# Altium PCB ADIO_Ver1.2.PcbDoc (part 2 of 2)
Units mm, origin at the board's own origin, x right, y up, seen from the top; angles counter-clockwise.
Board outline 260 x 90 mm, 2 copper layers (Top Layer, Bottom Layer); 178 components, 134 nets, 625 pads, 141 vias.
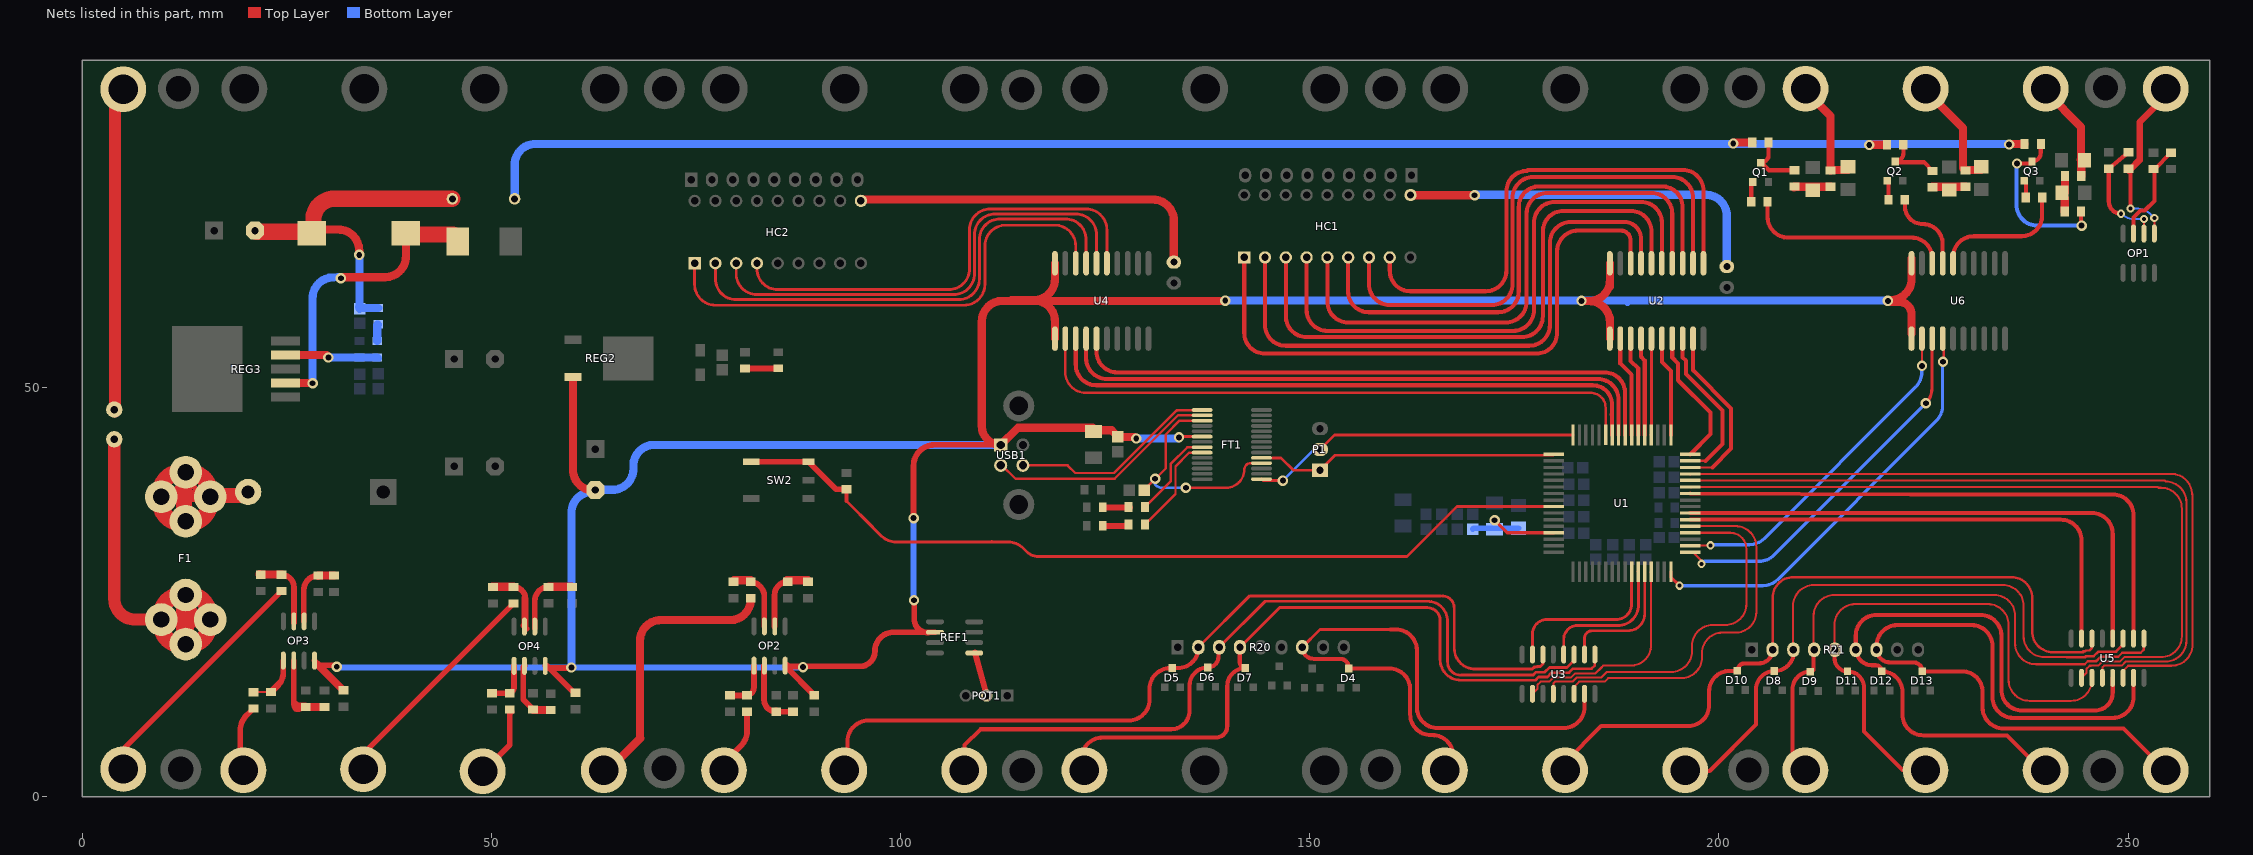
[diagram p2: the nets of this part, all layers, seen from the top]

## Via types
v1: diameter 1.27, hole 0.711, Top Layer to Bottom Layer, 127 vias
v2: diameter 1, hole 0.5, Top Layer to Bottom Layer, 13 vias
v3: diameter 1.5, hole 1, Top Layer to Bottom Layer, 1 vias

## Nets (pads, with @x,y where several pads share a name; then routed paths per layer and width w, separated by ;. In a path a pad name is that pad's centre, name@x,y a point inside that pad or via, vN(x,y) a via of type N, cw(c..) or ccw(c..) an arc to the next point about the centre after c; other vN are vias at no path point) (continued)
INPUT_DIG3: D4.3 R20.7 TP13.1 U3.7 | length 75.6
  Top Layer w0.35: R20.7@149.098,18.248 151.271,20.422 159.893,20.422
  Top Layer w0.5: R20.7@149.098,18.248 ccw(c150.506,18.248) 150.506,16.84 153.721,16.84 cw(c153.721,15.799) D4.3@154.762,15.799 ; D4.3@154.762,15.653 159.741,15.653 cw(c159.741,13.113) 162.281,13.113 162.281,10.058 ccw(c164.821,10.058) 164.821,7.518 164.998,7.518 cw(c164.998,4.978) TP13.1@167.538,4.978 ; 159.893,20.422 160.553,20.422 cw(c160.553,17.882) 163.093,17.882 163.093,10.922 ccw(c165.633,10.922) 165.633,8.382 181.039,8.382 ccw(c181.039,10.922) 183.579,10.922 U3.7@183.579,12.563
INPUT_DIG4: D5.3 R20.2 TP16.1 U3.14 | length 106.9
  Top Layer w0.33: 174.93,15.596 177.199,15.596
  Top Layer w0.35: R20.2@136.398,18.248 136.423,18.274 142.686,24.536 165.989,24.536 ; 166.178,24.529 cw(c166.178,23.042) 166.737,24.42 cw(c166.178,23.042) 167.665,23.042 167.665,18.136 ccw(c170.205,18.136) 170.205,15.596 174.93,15.596
  Top Layer w0.381: 177.199,15.596 177.423,15.819 177.676,15.819 177.762,15.905 178.195,15.905 178.499,16.208 U3.14@178.499,17.363
  Top Layer w0.5: TP16.1@93.218,3.226 93.523,3.531 93.523,6.756 cw(c96.063,6.756) 96.063,9.296 127.889,9.296 ccw(c127.889,11.836) 130.429,11.836 130.429,13.164 cw(c132.969,13.164) 132.969,15.704 D5.3@133.223,15.704 133.883,15.704 ccw(c133.883,18.244) 136.423,18.244 136.423,18.274 R20.2@136.423,18.313
INPUT_DIG5: D6.3 R20.3 TP15.1 U3.11 | length 97
  Top Layer w0.33: 174.35,14.855 177.321,14.855 177.675,15.209 178.725,15.209 179.293,15.778 181.446,15.778 U3.11@182.309,16.641
  Top Layer w0.35: R20.3@138.938,18.248 144.566,23.876 164.389,23.876 cw(c164.389,21.412) 166.853,21.412 166.853,16.461 ccw(c168.478,16.461) 168.478,14.836 cw(c168.497,14.836) 168.497,14.855 174.35,14.855
  Top Layer w0.381: U3.11@182.309,16.641 U3.11@182.309,17.363
  Top Layer w0.5: TP15.1@107.823,3.15 107.823,6.299 109.753,8.23 133.045,8.23 ccw(c133.045,10.516) 135.331,10.516 135.331,13.57 cw(c137.541,13.57) D6.3@137.541,15.78 ccw(c137.541,17.075) 138.836,17.075 R20.3@138.836,18.263
INPUT_DIG6: D7.3 R20.4 TP14.1 U3.9 | length 86
  Top Layer w0.33: 174.752,14.22 177.584,14.22 177.981,14.618 179.031,14.618 ; 179.014,14.635 179.048,14.635 179.556,15.143 181.709,15.143 182.198,15.632 184.455,15.632 184.849,16.026 U3.9@184.849,17.363
  Top Layer w0.35: R20.4@141.478,18.248 146.318,23.089 164.389,23.089 cw(c164.389,21.539) 164.695,23.058 cw(c164.389,21.539) 165.908,21.845 cw(c164.389,21.539) 165.938,21.539 165.938,16.76 ccw(c168.478,16.76) 168.478,14.22 174.752,14.22
  Top Layer w0.5: TP14.1@122.149,4.674 cw(c124.689,4.674) 124.689,7.214 138.532,7.214 ccw(c138.532,8.611) 139.929,8.611 139.929,13.494 cw(c142.138,13.494) D7.3@142.138,15.704 cw(c142.138,16.39) 141.453,16.39 R20.4@141.453,18.313
INPUT_DIG7: D8.3 R21.3 TP26.1 U5.11 | length 77.8
  Top Layer w0.254: R21.3@209.067,17.932 209.067,23.317 cw(c211.607,23.317) 211.607,25.857 234.696,25.857 cw(c234.696,23.317) 237.236,23.317 237.236,19.583 ccw(c239.776,19.583) 239.776,17.043 242.502,17.043
  Top Layer w0.3: 242.502,17.043 244.75,17.043 244.834,17.128 244.979,17.128 245.014,17.162 245.811,17.162 246.379,17.731 248.532,17.731 249.395,18.594 U5.11@249.395,19.316
  Top Layer w0.5: TP26.1@196.088,3.15 198.882,3.15 204.546,8.814 204.546,13.113 cw(c206.781,13.113) D8.3@206.781,15.348 ccw(c206.781,17.736) 209.169,17.736 R21.3@209.169,18.059
INPUT_DIG8: D9.3 R21.4 TP24.1 U5.9 | length 71.3
  Top Layer w0.254: R21.4@211.582,17.958 211.582,22.098 cw(c214.122,22.098) 214.122,24.638 233.655,24.638 cw(c233.655,22.098) 236.195,22.098 236.195,18.713 ccw(c238.735,18.713) 238.735,16.173 240.97,16.173
  Top Layer w0.3: 240.97,16.173 244.706,16.173 245.076,16.544 245.221,16.544 245.249,16.571 246.117,16.571 ; 246.1,16.588 246.134,16.588 246.642,17.096 248.795,17.096 249.284,17.585 251.541,17.585 251.935,17.979 U5.9@251.935,19.316
  Top Layer w0.5: TP24.1@210.744,3.2 208.991,4.953 208.991,13.088 cw(c211.176,13.088) D9.3@211.176,15.272 ccw(c211.176,15.678) 211.582,15.678 R21.4@211.582,17.958
INPUT_DIG9: D10.3 R21.2 TP27.1 U5.14 | length 89.5
  Top Layer w0.3: R21.2@206.56,17.951 206.56,24.282 cw(c209.1,24.282) 209.1,26.822 235.737,26.822 cw(c235.737,24.282) 238.277,24.282 238.277,20.186 ccw(c240.817,20.186) 240.817,17.646 240.944,17.646 ; 240.944,17.628 244.508,17.628 244.581,17.7 244.509,17.772 244.762,17.772 244.848,17.858 245.282,17.858 245.585,18.161 U5.14@245.585,19.316
  Top Layer w0.5: TP27.1@181.178,3.15 181.178,4.191 185.623,8.636 196.266,8.636 ccw(c196.266,11.176) 198.806,11.176 198.806,12.834 cw(c201.346,12.834) 201.346,15.374 D10.3@202.26,15.374 ; D10.3@202.311,15.443 cw(c203.149,15.443) 203.149,16.281 204.891,16.281 ccw(c204.891,17.951) R21.2@206.56,17.951
INPUT_DIG10: D11.3 R21.5 TP18.1 U5.3 | length 69
  Top Layer w0.254: R21.5@214.122,17.856 214.122,20.98 cw(c216.662,20.98) 216.662,23.52 232.867,23.52 cw(c232.867,20.98) 235.407,20.98 235.407,14.249 ccw(c237.947,14.249) 237.947,11.709 243.045,11.709 ccw(c243.045,14.249) 245.585,14.249 U5.3@245.585,14.516
  Top Layer w0.5: R21.5@214.147,18.009 214.147,16.882 ccw(c215.718,16.882) D11.3@215.718,15.311 cw(c215.718,13.3) 217.729,13.3 217.729,7.95 222.428,3.251 TP18.1@225.247,3.251
INPUT_DIG11: D12.3 R21.6 TP19.1 U5.5 | length 79.3
  Top Layer w0.5: R21.6@216.72,17.951 216.72,19.66 cw(c219.26,19.66) 219.26,22.2 231.978,22.2 cw(c231.978,19.66) 234.518,19.66 234.518,13.056 ccw(c237.058,13.056) 237.058,10.516 245.925,10.516 ccw(c245.925,12.716) 248.125,12.716 U5.5@248.125,14.516 ; R21.6@216.738,17.983 216.789,17.983 ccw(c218.719,17.983) 218.719,16.053 219.167,16.053 cw(c219.167,15.311) D12.3@219.909,15.311 ; D12.3@219.671,15.311 D12.3@219.909,15.311 ; TP19.1@239.674,3.023 235.204,7.493 224.968,7.493 cw(c224.968,10.033) 222.428,10.033 222.428,12.792 ccw(c219.909,12.792) D12.3@219.909,15.311
INPUT_DIG12: D13.3 R21.7 TP23.1 U5.7 | length 90
  Top Layer w0.5: R21.7@219.26,17.951 219.26,18.415 cw(c221.8,18.415) 221.8,20.955 230.886,20.955 cw(c230.886,18.415) 233.426,18.415 233.426,12.167 ccw(c235.966,12.167) 235.966,9.627 248.125,9.627 ccw(c248.125,12.167) 250.665,12.167 U5.7@250.665,14.516 ; R21.7@219.278,18.059 ccw(c220.929,18.059) 220.929,16.408 223.765,16.408 cw(c223.765,15.311) D13.3@224.862,15.311 229.692,15.311 cw(c229.692,12.771) 232.232,12.771 232.232,10.871 ccw(c234.772,10.871) 234.772,8.331 249.428,8.331 TP23.1@254.559,3.2
NetC8_2: C8.2 R1.1 R47.2 | length 4.5
  Top Layer w1: R1.1@209.169,74.447 209.235,74.513 R47.2@213.629,74.513
NetC11_1: C11.1 C12.2 FB2.1 L3.2 R3.2 | length 46.5
  Top Layer w1: L3.2@27.915,69.291 28.27,69.291 31.318,69.291 cw(c31.318,66.751) 33.858,66.751 v1(33.858,66.192)
  Top Layer w2: C11.1@21.26,69.012 27.88,69.012 cw(c27.88,68.834) L3.2@28.057,68.834 ; L3.2@28.27,68.656 28.27,69.291 28.27,70.51 cw(c30.81,70.51) 30.81,73.05 FB2.1@45.237,73.05
  Bottom Layer w0.5: C12.2@33.909,59.625 36.095,59.625 R3.2@36.195,59.725
  Bottom Layer w1: C12.2@33.858,59.842 ccw(c33.976,59.842) C12.2@33.909,59.746 ; v1(33.858,66.192) cw(c33.858,66.142) 33.909,66.142 C12.2@33.909,59.746 ; C12.2@33.909,59.625 C12.2@33.909,59.746 ; R3.2@36.195,59.725 33.976,59.725 cw(c33.976,59.842) C12.2@33.909,59.746
NetC14_2: C14.2 FT1.4 FT1.17 | length 28.4
  Top Layer w0.3: C14.2@129.762,37.448 132.41,40.096 132.41,44.247 134.108,45.945 FT1.17@136.862,45.945 ; v1(134.874,37.744) 139.784,37.744 ccw(c139.784,39.972) 142.011,39.972 cw(c142.784,39.972) 142.784,40.745 FT1.4@144.112,40.745
  Bottom Layer w0.3: v1@130.988,38.633 ccw(c131.877,38.633) 131.877,37.744 v1(134.874,37.744)
  other v1: 131.115,38.837
NetC15_2: C15.2 R47.1 TP12.1 | length 13.3
  Top Layer w1: TP12.1@210.464,86.335 213.629,83.17 R47.1@213.629,76.513 ; R47.1@213.639,76.606 213.681,76.565 C15.2@215.773,76.565
NetC16_2: C16.2 R48.1 R49.2 | length 4.1
  Top Layer w1: R48.1@226.06,74.549 226.095,74.514 228.143,74.514 R49.2@230.149,74.514
NetC24_1: C24.1 C25.2 R_ferrit1.1 U1.61 | length 13.5
  Top Layer w0.4: v1(172.594,33.78) 174.133,32.241 U1.61@179.813,32.241
  Bottom Layer w0.7: C25.2@169.927,32.693 170.027,32.793 R_ferrit1.1@175.515,32.793
NetC34_2: C34.2 R49.1 TP21.1 | length 16.2
  Top Layer w0.35: TP21.1@226.162,86.432 226.594,86 TP21.1@227.035,85.56
  Top Layer w0.8: TP21.1@226.39,86.36 226.479,86.271 TP21.1@227.035,85.716
  Top Layer w1: TP21.1@225.273,86.665 225.273,86.258 229.845,81.686 229.845,76.784 230.065,76.564 C34.2@232.043,76.564
NetC35_2: C35.2 R50.1 R51.2 | length 4
  Top Layer w1: C35.2@242.011,73.355 242.256,73.111 R50.1@242.256,71.501 ; R51.2@242.291,75.87 242.307,75.853 C35.2@242.307,73.802
NetC36_2: C36.2 R51.1 TP28.1 | length 12.4
  Top Layer w1: TP28.1@240.081,86.385 240.081,86.015 244.257,81.839 C36.2@244.257,77.79 ; C36.2@244.221,77.826 C36.2@244.257,77.79 ; C36.2@244.257,77.763 C36.2@244.257,77.79 ; R51.1@244.281,75.844 244.281,77.765 C36.2@244.257,77.79
NetD1_1: D1.1 F1.2 | length 66.5
  Top Layer w0.7: F1.2@8.806,36.728 8.919,36.728 9.564,37.373 11.826,39.636 F1.2@11.854,39.663 ; F1.2@8.854,36.663 9.55,36.663 10.642,36.663 11.854,36.663 ; F1.2@11.854,33.663 11.854,36.663 ; F1.2@12.105,39.914 F1.2@11.854,39.663 ; 11.854,36.663 12.675,36.663 14.854,36.663 14.789,36.728 12.675,38.843 12.613,38.905 11.877,39.64 F1.2@11.854,39.663
  Top Layer w1: F1.2@15.672,36.347 cw(c16.561,36.347) 15.721,36.638 cw(c16.561,36.347) 16.561,37.236 20.279,37.236 D1.1@20.295,37.236
  Top Layer w1.5: F1.2@9.55,36.728 F1.2@10.877,36.728 ; F1.2@9.703,36.601 10.084,36.601 ccw(c10.084,39.141) 10.642,36.663 ccw(c10.084,39.141) F1.2@10.877,36.728 ; F1.2@12.675,33.638 12.675,36.663 12.675,36.728 ; F1.2@15.621,36.982 cw(c15.875,36.982) 15.875,37.236 F1.2@16.561,37.236 ; D1.1@20.295,37.389 cw(c19.544,37.389) 20.279,37.236 cw(c19.544,37.389) 19.544,36.638 15.721,36.638 F1.2@15.675,36.638 ccw(c15.584,36.638) 15.621,36.721 ccw(c15.584,36.638) 15.584,36.728 14.789,36.728 12.675,36.728 ; F1.2@10.877,36.728 ccw(c10.084,39.141) 12.613,38.905 ccw(c10.084,39.141) 12.624,39.141 12.624,39.649 12.624,39.751 cw(c12.624,39.7) 12.675,39.7 F1.2@12.675,39.638 12.675,38.843 12.675,36.728 ; F1.2@10.877,36.728 12.675,36.728
  Top Layer w2: F1.2@12.624,39.649 12.09,39.649 ccw(c12.09,37.109) 11.877,39.64 ccw(c12.09,37.109) 11.826,39.636 ccw(c12.09,37.109) 9.564,37.373 ccw(c12.09,37.109) 9.55,37.109 9.55,36.728 9.55,36.663 9.55,35.992 ccw(c12.09,35.992) 12.09,33.452 13.081,33.452 ccw(c13.081,35.992) 15.621,35.992 15.621,36.721 15.621,36.982 15.621,37.098 ccw(c13.081,37.098) 13.081,39.638 F1.2@12.675,39.638
NetDZ2_2: DZ2.2 L3.1 REG3.2 | length 37.9
  Top Layer w1: REG3.2@24.859,50.548 28.091,50.548 cw(c28.091,50.521) 28.118,50.521 v1(28.169,50.521) ; v1(31.623,63.348) 31.75,63.475 37.033,63.475 ccw(c37.033,66.015) 39.573,66.015 39.573,68.682 L3.1@39.573,68.732
  Top Layer w2: L3.1@39.573,68.682 45.086,68.682 cw(c45.086,67.843) DZ2.2@45.924,67.843
  Bottom Layer w1: v1(28.169,50.521) 28.169,60.909 cw(c30.709,60.909) 30.709,63.449 31.267,63.475 31.725,63.449 v1(31.623,63.348)
NetF1_1: F1.1 KEY2.1 | length 77.6
  Top Layer w0.7: F1.1@14.854,21.663 12.675,23.843 11.854,24.663 F1.1@11.854,24.536 ; F1.1@11.854,24.536 9.684,22.366 8.981,21.663 8.854,21.663 8.88,21.638 9.66,20.858 11.854,18.663 11.854,21.638 F1.1@11.854,24.536
  Top Layer w1.5: KEY2.1@3.937,43.612 3.937,24.178 ccw(c6.477,24.178) 6.477,21.638 8.88,21.638 9.652,21.638 F1.1@9.675,21.638
  Top Layer w2: F1.1@9.652,21.666 9.652,21.638 9.652,21.057 ccw(c12.192,21.057) 9.66,20.858 ccw(c12.192,21.057) 12.192,18.517 F1.1@12.675,18.517 ; F1.1@12.598,18.237 ccw(c12.598,18.313) 12.675,18.313 F1.1@12.675,18.517 ; F1.1@12.675,24.638 12.675,23.843 12.675,21.638 ; F1.1@15.773,21.514 ccw(c15.649,21.514) 15.649,21.638 F1.1@15.519,21.638 ; F1.1@12.675,18.517 12.979,18.517 ccw(c12.979,21.057) 15.519,21.057 F1.1@15.519,21.638 ; F1.1@12.675,18.517 F1.1@12.675,18.638 12.675,21.638 ; 12.675,21.638 F1.1@15.519,21.638 ; 12.675,21.638 11.854,21.638 F1.1@9.675,21.638 9.675,22.149 cw(c12.215,22.149) 9.684,22.366 cw(c12.215,22.149) 11.854,24.663 cw(c12.215,22.149) 12.215,24.689 12.979,24.689 cw(c12.979,22.149) 15.519,22.149 F1.1@15.519,21.638
NetFT1_15: FT1.15 USB1.3 | length 25.5
  Top Layer w0.3: USB1.3@114.957,40.482 120.427,40.482 121.361,39.548 126.09,39.548 133.714,47.172 133.761,47.172 cw(c133.812,47.172) 133.812,47.224 136.841,47.224 FT1.15@136.862,47.245
NetFT1_16: FT1.16 USB1.2 | length 28.5
  Top Layer w0.3: USB1.2@112.247,40.482 112.426,40.482 114.071,38.837 126.162,38.837 133.943,46.618 ; 133.943,46.601 133.943,46.595 FT1.16@136.862,46.595
NetFT1_22: FT1.22 R7.1 | length 11.3
  Top Layer w0.3: R7.1@129.862,35.377 133.045,38.561 133.045,40.691 135.049,42.695 FT1.22@136.862,42.695
NetFT1_23: FT1.23 R5.1 | length 12.6
  Top Layer w0.3: R5.1@129.862,33.246 133.604,36.988 133.604,40.361 135.288,42.045 FT1.23@136.862,42.045
NetHC1_1: HC1.1 U2.18 | length 74.2
  Top Layer w0.5: HC1.1@142.004,65.888 142.004,56.667 ccw(c144.544,56.667) 144.544,54.127 177.698,54.127 ccw(c177.698,56.667) 180.238,56.667 180.238,66.624 cw(c182.778,66.624) 182.778,69.164 188.011,69.164 cw(c188.011,67.953) 189.222,67.953 U2.18@189.222,65.172
NetHC1_2: HC1.2 U2.17 | length 72.7
  Top Layer w0.5: HC1.2@144.544,65.888 144.544,57.633 ccw(c147.084,57.633) 147.084,55.093 176.809,55.093 ccw(c176.809,57.633) 179.349,57.633 179.349,67.666 cw(c181.889,67.666) 181.889,70.206 188.443,70.206 cw(c188.443,68.156) 190.492,68.156 U2.17@190.492,65.172
NetHC1_3: HC1.3 U2.16 | length 71.9
  Top Layer w0.5: HC1.3@147.084,65.888 147.084,58.699 ccw(c149.624,58.699) 149.624,56.159 175.946,56.159 ccw(c175.946,58.699) 178.486,58.699 178.486,69.037 cw(c181.026,69.037) 181.026,71.577 189.222,71.577 cw(c189.222,69.037) 191.762,69.037 U2.16@191.762,65.172
NetHC1_4: HC1.4 U2.15 | length 71.3
  Top Layer w0.5: HC1.4@149.624,65.888 149.624,59.453 ccw(c152.164,59.453) 152.164,56.913 174.866,56.913 ccw(c174.866,59.453) 177.406,59.453 177.406,70.129 cw(c179.946,70.129) 179.946,72.669 190.492,72.669 cw(c190.492,70.129) 193.032,70.129 U2.15@193.032,65.172
NetHC1_5: HC1.5 U2.14 | length 70.1
  Top Layer w0.5: HC1.5@152.164,65.888 152.164,60.477 ccw(c154.704,60.477) 154.704,57.937 173.965,57.937 ccw(c173.965,60.477) 176.505,60.477 176.505,71.222 cw(c179.045,71.222) 179.045,73.762 191.762,73.762 cw(c191.762,71.222) 194.302,71.222 U2.14@194.302,65.172
NetHC1_6: HC1.6 U2.13 | length 68
  Top Layer w0.5: HC1.6@154.704,65.888 154.704,61.722 ccw(c157.244,61.722) 157.244,59.182 173.004,59.182 ccw(c173.004,61.722) 175.544,61.722 175.544,72.034 cw(c178.084,72.034) 178.084,74.574 193.032,74.574 cw(c193.032,72.034) 195.572,72.034 U2.13@195.572,65.172
NetHC1_7: HC1.7 U2.12 | length 67.2
  Top Layer w0.5: HC1.7@157.244,65.888 157.244,62.611 ccw(c159.784,62.611) 159.784,60.071 172.25,60.071 ccw(c172.25,62.611) 174.79,62.611 174.79,73.177 cw(c177.33,73.177) 177.33,75.717 194.302,75.717 cw(c194.302,73.177) 196.842,73.177 U2.12@196.842,65.172
NetHC1_8: HC1.8 U2.11 | length 64.3
  Top Layer w0.5: HC1.8@159.784,65.888 159.784,64.287 ccw(c162.324,64.287) 162.324,61.747 171.496,61.747 ccw(c171.496,64.287) 174.036,64.287 174.036,73.931 cw(c176.576,73.931) 176.576,76.471 176.686,76.581 195.572,76.581 cw(c195.572,74.041) 198.112,74.041 U2.11@198.112,65.172
NetHC1_10: HC1.10 J2.1 | length 46.3
  Top Layer w1: HC1.10@162.382,73.482 v1(170.155,73.482)
  Bottom Layer w1: v1@170.104,73.533 198.425,73.533 cw(c198.425,70.993) 200.965,70.993 J2.1@200.965,64.77
NetHC2_1: HC2.1 U4.18 | length 61.8
  Top Layer w0.35: HC2.1@74.846,65.176 74.846,62.586 ccw(c77.386,62.586) 77.386,60.046 107.772,60.046 ccw(c107.772,62.586) 110.312,62.586 110.312,67.285 cw(c112.852,67.285) 112.852,69.825 118.872,69.825 cw(c118.872,67.285) 121.412,67.285 U4.18@121.412,65.172
NetHC2_2: HC2.2 U4.17 | length 60.7
  Top Layer w0.35: HC2.2@77.386,65.176 77.386,63.267 ccw(c79.926,63.267) 79.926,60.727 107.101,60.727 ccw(c107.101,63.267) 109.641,63.267 109.641,68.058 cw(c112.181,68.058) 112.181,70.598 120.142,70.598 cw(c120.142,68.058) 122.682,68.058 U4.17@122.682,65.172
NetHC2_3: HC2.3 U4.16 | length 59.4
  Top Layer w0.35: HC2.3@79.926,65.176 79.926,63.887 ccw(c82.466,63.887) 82.466,61.347 106.497,61.347 ccw(c106.497,63.887) 109.037,63.887 109.037,68.662 cw(c111.577,68.662) 111.577,71.202 121.412,71.202 cw(c121.412,68.662) 123.952,68.662 U4.16@123.952,65.172
NetHC2_4: HC2.4 U4.15 | length 58.1
  Top Layer w0.35: HC2.4@82.466,65.176 82.466,64.491 ccw(c85.006,64.491) 85.006,61.951 105.893,61.951 ccw(c105.893,64.491) 108.433,64.491 108.433,69.266 cw(c110.973,69.266) 110.973,71.806 122.682,71.806 cw(c122.682,69.266) 125.222,69.266 U4.15@125.222,65.172
NetHC2_10: HC2.10 J3.1 | length 44.8
  Top Layer w1: HC2.10@95.148,72.949 130.861,72.949 cw(c130.861,70.409) 133.401,70.409 J3.1@133.401,65.303
NetKEY1_1: KEY1.1 TP-IN.1 | length 38.7
  Top Layer w1.5: KEY1.1@4.013,47.092 TP-IN.1@4.013,85.75
NetL1_1: L1.1 R2.2 | length 4.1
  Top Layer w0.7: R2.2@80.989,52.307 81.009,52.327 L1.1@85.053,52.327
NetL4_2: L4.2 R5.2 | length 3.4
  Top Layer w0.7: L4.2@124.703,33.081 R5.2@127.892,33.081 ; R5.2@127.511,33.081 R5.2@127.676,33.246
NetL5_2: L5.2 R7.2 | length 3.4
  Top Layer w0.7: L5.2@124.729,35.339 R7.2@128.045,35.339 ; R7.2@127.511,35.339 R7.2@127.549,35.377
NetOP1_2: OP1.2 R10.1 R11.2 | length 14.2
  Top Layer w0.254: OP1.2@251.935,68.801 v2(251.935,70.592)
  Top Layer w0.5: v2(249.141,71.227) cw(c249.141,72.726) 247.642,72.726 R11.2@247.642,76.73 R10.1@250.055,78.73
  Bottom Layer w0.254: v2(249.141,71.227) ccw(c250.674,72.76) 250.674,70.592 v2(251.935,70.592)
NetOP1_3: OP1.3 R13.2 R14.2 | length 12.1
  Top Layer w0.5: OP1.3@250.665,68.801 250.665,70.742 251.519,71.596 252.034,71.596 253.205,72.767 253.205,76.622 R13.2@255.262,78.679
NetOP2_2: OP2.2 R23.1 R29.2 | length 9
  Top Layer w0.7: OP2.2@84.607,20.803 84.607,24.622 cw(c86.233,24.622) R29.2@86.233,26.248
  Top Layer w1: R29.2@86.106,26.388 cw(c86.166,26.388) 86.166,26.449 R23.1@88.697,26.449
NetOP2_3: OP2.3 R35.2 R41.2 | length 8.6
  Top Layer w0.7: R35.2@81.559,26.238 cw(c81.559,24.429) 83.369,24.429 OP2.3@83.369,20.808
  Top Layer w1: R41.2@79.654,26.449 ccw(c79.747,26.449) R41.2@79.747,26.356 ; R41.2@79.747,26.449 R35.2@81.712,26.449
NetOP2_5: OP2.5 R36.2 R42.2 | length 6.3
  Top Layer w0.7: R42.2@79.146,12.522 ccw(c79.324,12.522) 79.324,12.344 81.102,12.344 cw(c81.153,12.344) 81.153,12.395 ccw(c81.153,13.341) 82.099,13.341 OP2.5@82.099,16.008
NetOP2_6: OP2.6 R24.1 R30.2 | length 8.6
  Top Layer w0.7: OP2.6@83.337,16.002 83.337,11.852 ccw(c84.811,11.852) R24.1@84.785,10.379 ; R24.1@84.709,10.363 84.709,10.379 R24.1@84.785,10.379 ; R24.1@84.811,10.379 cw(c84.811,11.852) R24.1@84.785,10.379 ; R30.2@86.868,10.379 R24.1@84.785,10.379
  Top Layer w1: R24.1@84.785,10.379 R24.1@84.785,10.389
NetOP3_2: OP3.2 R25.1 R31.2 | length 8.5
  Top Layer w0.7: OP3.2@27.102,21.438 27.102,25.257 cw(c28.854,25.257) R31.2@28.854,27.01
  Top Layer w1: R31.2@28.854,27 28.864,27.01 R25.1@30.793,27.01
NetOP3_3: OP3.3 R37.2 R43.2 | length 13.7
  Top Layer w0.254: R43.2@21.826,27.111 21.962,27.111 R37.2@24.366,27.111 ; OP3.3@25.865,20.663 OP3.3@25.865,21.425 OP3.3@25.865,22.2
  Top Layer w0.5: R43.2@21.92,27.153 ccw(c21.962,27.153) 21.929,27.127 ccw(c21.962,27.153) R43.2@21.962,27.111
  Top Layer w0.7: R37.2@24.366,27.111 cw(c24.366,25.595) 25.883,25.595 OP3.3@25.883,21.26
  Top Layer w1: R43.2@21.666,27.203 ccw(c21.758,27.203) 21.758,27.111 R43.2@21.826,27.111 21.826,27.127 21.929,27.127 R37.2@24.409,27.127
NetOP3_5: OP3.5 R38.2 R44.2 | length 11
  Top Layer w0.3: R38.2@20.955,12.786 R44.2@22.69,12.786 ; R44.2@23.071,12.786 R44.2@22.69,12.786 ; OP3.5@24.595,16.625 24.468,16.498 24.468,14.564 R44.2@22.69,12.786
  Top Layer w0.7: R44.2@23.216,12.827 23.851,13.462 ccw(c22.055,15.259) 24.595,15.259 OP3.5@24.595,16.625
NetOP3_6: OP3.6 R26.1 R32.2 | length 10.7
  Top Layer w0.7: OP3.6@25.865,16.625 25.865,11.446 ccw(c26.966,11.446) 26.187,10.668 26.294,10.668 ccw(c26.294,11.882) 27.126,10.998 ccw(c26.294,11.882) R26.1@27.153,11.024
  Top Layer w1: 26.111,11.201 ccw(c26.314,11.201) 26.314,10.998 27.126,10.998 27.229,10.998 ccw(c27.264,10.998) 27.264,10.963 R26.1@27.33,10.963 R32.2@29.616,10.963
NetOP4_2: OP4.2 R27.1 R33.2 | length 11.6
  Top Layer w0.7: OP4.2@55.321,20.574 OP4.2@55.321,20.777 55.321,23.936 cw(c57.008,23.936) R33.2@57.008,25.622 R27.1@59.844,25.622
  Top Layer w1: R33.2@57.008,25.622 cw(c57.04,25.622) 57.04,25.654 R27.1@59.792,25.654
NetOP4_3: OP4.3 R39.2 R45.2 | length 14.9
  Top Layer w0.7: R45.2@50.192,25.611 R39.2@52.732,25.611 cw(c52.732,24.165) 54.178,24.165 54.178,20.676 ccw(c54.331,20.676) OP4.3@54.331,20.523 ; OP4.3@53.918,20.911 OP4.3@54.051,20.777 54.051,24.292
  Top Layer w1: R45.2@50.14,25.654 52.689,25.654 cw(c52.689,25.611) R39.2@52.732,25.611
NetOP4_5: OP4.5 R40.2 R46.2 | length 6
  Top Layer w0.7: R46.2@50.091,12.632 R40.2@52.129,12.632 ; R40.2@52.019,12.624 ccw(c52.019,13.386) R40.2@52.129,12.632 ; R40.2@52.253,12.632 R40.2@52.129,12.632 ; OP4.5@52.781,15.977 52.781,13.386 cw(c52.019,13.386) R40.2@52.129,12.632
NetOP4_6: OP4.6 R28.1 R34.2 | length 9.8
  Top Layer w0.7: 53.899,11.879 55.103,10.675 R28.1@55.103,10.629 55.106,10.632 R34.2@57.125,10.632 ; 53.899,12.158 53.899,15.825 OP4.6@54.051,15.977
  Top Layer w1: R28.1@55.118,10.592 55.118,10.582 R34.2@57.277,10.582
NetPOT1_2: POT1.2 REF1.5 | length 5.5
  Top Layer w0.7: REF1.5@109.093,17.628 109.107,17.577 POT1.2@110.516,12.344
NetQ1_1: Q1.1 R16.1 | length 2.5
  Top Layer w0.5: R16.1@203.953,72.695 203.953,74.899 cw(c204.155,74.899) Q1.1@204.155,75.101
NetQ2_1: Q2.1 R18.1 | length 2.4
  Top Layer w0.5: Q2.1@220.589,75.254 cw(c220.589,75.126) 220.717,75.126 R18.1@220.717,72.923
NetQ3_1: Q3.1 R22.1 | length 2.2
  Top Layer w0.5: Q3.1@237.302,75.254 cw(c237.302,75.05) 237.506,75.05 R22.1@237.506,73.203
NetR3_1: R3.1 R4.2 | length 4.2
  Bottom Layer w0.5: R4.2@36.068,55.661 36.195,55.788 R3.1@36.195,57.725
  Bottom Layer w1: R4.2@36.068,55.661 36.068,57.633 cw(c36.144,57.633) R3.1@36.144,57.709
NetR4_1: R4.1 R6.1 REG3.4 | length 12.1
  Top Layer w1: REG3.4@26.585,53.95 29.896,53.95 29.963,53.883 29.963,53.797 v1(30.099,53.661)
  Bottom Layer w0.7: R6.1@33.909,53.661 34.036,53.534 R4.1@36.322,53.534
  Bottom Layer w1: v1(30.099,53.661) R6.1@33.909,53.661 ; R6.1@33.909,53.67 R6.1@33.909,53.661 ; R4.1@36.068,53.661 R6.1@33.909,53.661
NetR16_2: R16.2 U6.18 | length 25.5
  Top Layer w0.254: U6.18@226.078,65.121 U6.18@226.078,65.172
  Top Layer w0.5: R16.2@205.953,72.695 205.953,70.841 ccw(c208.493,70.841) 208.493,68.301 223.538,68.301 cw(c223.538,65.761) 226.078,65.761 U6.18@226.078,65.172
NetR18_2: R18.2 U6.17 | length 10.4
  Top Layer w0.254: U6.17@227.348,65.121 U6.17@227.348,65.172
  Top Layer w0.5: R18.2@222.717,72.923 222.717,72.177 ccw(c224.942,72.177) 224.942,69.952 cw(c224.942,67.546) 227.348,67.546 U6.17@227.348,65.172
NetR22_2: R22.2 U6.16 | length 16.8
  Top Layer w0.254: U6.16@228.618,65.121 U6.16@228.618,65.172 U6.16@228.618,65.761
  Top Layer w0.5: U6.16@228.618,65.761 228.618,65.938 cw(c231.158,65.938) 231.158,68.478 236.966,68.478 ccw(c236.966,71.018) 239.506,71.018 R22.2@239.506,73.203
NetR35_1: R35.1 TP29.1 | length 46.8
  Top Layer w0.5: 68.199,7.137 68.199,19.383
  Top Layer w1: TP29.1@63.83,3.15 64.211,3.15 68.174,7.112 ; 68.199,7.137 68.174,7.112 ; R35.1@81.712,24.248 81.712,24.105 cw(c79.172,24.105) 79.172,21.565 70.714,21.565 ccw(c70.714,19.025) 68.199,19.383 ccw(c70.714,19.025) 68.174,19.025 68.174,7.112
NetR36_1: R36.1 TP30.1 | length 7.9
  Top Layer w0.7: TP30.1@78.181,3.632 78.181,3.886 80.511,6.216 ccw(c78.715,8.012) 81.255,8.012 R36.1@81.255,10.379
NetR37_1: R37.1 TP31.1 | length 29.6
  Top Layer w0.7: TP31.1@4.623,3.531 4.623,4.315 cw(c7.163,4.315) 5.367,6.112 R37.1@24.366,25.111
NetR38_1: R38.1 TP32.1 | length 8.6
  Top Layer w0.7: TP32.1@19.329,2.667 19.329,8.108 cw(c21.869,8.108) 20.073,9.904 R38.1@20.93,10.76
NetR39_1: R39.1 TP33.1 | length 28.1
  Top Layer w0.7: TP33.1@33.503,3.404 cw(c35.864,3.404) 34.194,5.073 R39.1@52.732,23.611
NetR40_1: R40.1 TP34.1 | length 9.6
  Top Layer w0.7: TP34.1@48.793,2.845 52.25,6.301 R40.1@52.25,10.629 R40.1@52.504,10.375
OUTPUT_ANA_0: OP1.1 R10.2 TP4.1 | length 29.6
  Top Layer w0.254: OP1.1@253.205,68.801 v2@253.205,70.592
  Top Layer w0.35: R10.2@250.055,76.73 250.364,76.73 250.542,76.73 251.663,77.851 251.663,82.663 ; TP4.1@254.711,86.092 254.914,86.295 TP4.1@255.051,86.432
  Top Layer w0.5: R10.2@250.055,76.73 cw(c250.055,76.501) 250.252,76.618 cw(c250.055,76.501) 250.284,76.501 v2(250.284,71.862)
  Top Layer w0.8: R10.2@250.114,76.479 250.252,76.618 250.364,76.73 251.409,77.775 251.409,82.409 251.663,82.663 ; 251.675,82.663 251.663,82.663 ; TP4.1@254.914,85.928 251.663,82.677 251.663,82.663 ; TP4.1@254.914,86.092 254.914,86.295 TP4.1@254.914,86.335 ; TP4.1@254.94,86.182 TP4.1@254.991,86.182 ; TP4.1@254.94,86.448 TP4.1@254.94,86.843
  Bottom Layer w0.254: v2(250.284,71.862) 251.01,71.862 cw(c251.01,69.322) 252.806,71.118 v2(253.205,70.719)
PC0: U1.10 U3.15 | length 20.7
  Top Layer w0.254: U1.10@189.338,27.491 U1.10@189.358,27.471
  Top Layer w0.35: U3.15@177.229,17.602 177.229,19.876 cw(c178.994,19.876) 178.994,21.641 187.437,21.641 ccw(c187.437,23.542) 189.338,23.542
  Top Layer w0.381: U3.15@177.229,17.363 U3.15@177.229,17.602 ; 189.338,23.542 U1.10@189.338,27.491
PC1: U1.11 U3.12 | length 17.5
  Top Layer w0.35: U3.12@181.039,17.653 181.039,19.215 cw(c182.728,19.215) 182.728,20.904 187.665,20.904 ccw(c187.665,23.417) 190.178,23.417 190.178,23.673
  Top Layer w0.381: U3.12@181.039,17.363 U3.12@181.039,17.653 ; U1.11@190.151,27.491 190.178,27.464 190.178,23.673
PC2: U1.12 U3.10 | length 16.2
  Top Layer w0.35: 183.579,18.847 183.579,19.342 cw(c184.506,19.342) 184.506,20.269 188.883,20.269 ccw(c188.883,22.325) 190.938,22.325 U1.12@190.938,27.491
  Top Layer w0.381: U3.10@183.579,17.363 183.579,18.847
PC3: U1.13 U3.2 | length 26.7
  Top Layer w0.254: U3.2@177.229,12.563 177.818,13.152 177.818,13.646 178.218,14.046 179.268,14.046 179.793,14.571 181.946,14.571 182.435,15.06 184.93,15.06 185.653,15.784 185.871,16.002 189.186,16.002 ccw(c189.186,18.542) 191.726,18.542 191.726,21.588 191.726,21.742 U1.13@191.726,27.491 U1.13@191.644,27.408
PC4: U1.20 U3.4 | length 45.1
  Top Layer w0.254: U3.4@179.769,12.563 179.769,13.828 180.004,14.063 182.156,14.063 182.645,14.552 185.653,14.552 ; 185.653,14.6 186.268,15.215 193.294,15.215 ; 193.345,15.239 194.183,15.239 ccw(c194.183,17.779) 196.723,17.779 196.723,18.44 cw(c199.263,18.44) 199.263,20.98 200.812,20.98 ccw(c200.812,23.52) 201.258,21.02 ccw(c200.812,23.52) 203.313,23.075 ccw(c200.812,23.52) 203.352,23.52 203.352,30.285 ccw(c201.397,30.285) 201.397,32.241 U1.20@196.501,32.241
PC5: U1.21 U3.6 | length 47.1
  Top Layer w0.254: U3.6@182.309,12.563 182.309,13.414 182.939,14.044 186.036,14.044 186.469,14.478 191.688,14.478 ; 191.77,14.485 195.402,14.485 ccw(c195.402,17.025) 196.015,14.56 ccw(c195.402,17.025) 197.942,17.025 197.942,17.551 cw(c200.431,17.551) 200.431,20.041 202.032,20.041 ccw(c202.032,22.581) 202.477,20.08 ccw(c202.032,22.581) 204.532,22.135 ccw(c202.032,22.581) 204.572,22.581 204.572,30.514 ccw(c202.032,30.514) 202.032,33.054 U1.21@196.501,33.054 ; U1.21@196.46,33.013 195.825,33.013 195.819,33.018 U1.21@196.501,33.018
PC6: U1.22 U5.15 | length 61.2
  Top Layer w0.5: U1.22@196.501,33.841 231.996,33.841 241.775,33.841 cw(c241.775,31.301) 244.315,31.301 U5.15@244.315,19.316
PC7: U1.23 U5.12 | length 65.9
  Top Layer w0.5: U1.23@196.501,34.654 235.043,34.654 245.585,34.654 cw(c245.585,32.114) 248.125,32.114 U5.12@248.125,19.316
PD0: U1.26 U5.10 | length 86.1
  Top Layer w0.254: U1.26@196.501,36.955 U1.26@196.501,37.042
  Top Layer w0.3: U1.26@196.501,36.955 211.811,36.955
  Top Layer w0.5: U1.26@196.501,37.042 223.418,36.932 236.271,36.932 248.125,36.932 cw(c248.125,34.392) 250.665,34.392 U5.10@250.665,19.316
PD1: U1.27 U5.2 | length 94
  Top Layer w0.254: U1.27@196.571,37.795 cw(c196.621,37.795) U1.27@196.583,37.828 ; U1.27@197.104,37.821 cw(c197.104,37.846) U1.27@197.089,37.826 ; U5.2@244.315,14.516 244.904,15.105 244.904,15.598 245.303,15.997 245.448,15.997 245.449,15.999 246.354,15.999 246.879,16.524 249.032,16.524 249.551,17.043 254.025,17.043 ccw(c254.025,19.583) 256.565,19.553 ; U1.27@196.516,37.844 253.646,37.844 253.746,37.744 254.025,37.744 cw(c254.025,35.204) 256.565,35.204 256.565,19.583 ; U1.27@196.516,37.844 U1.27@196.607,37.844 ; U1.27@196.516,37.844 U1.27@196.501,37.829 U1.27@196.583,37.828 ; U1.27@196.583,37.828 cw(c196.621,37.795) U1.27@196.607,37.844 ; U1.27@196.583,37.828 U1.27@197.089,37.826 ; U1.27@196.607,37.844 cw(c196.621,37.795) 196.621,37.846 197.079,37.846 ccw(c197.104,37.846) U1.27@197.079,37.844 ; U1.27@196.607,37.844 U1.27@197.079,37.844 ; U1.27@197.079,37.844 ccw(c197.104,37.846) U1.27@197.089,37.826 ; 256.565,19.553 ccw(c254.025,19.583) 256.565,19.578 ccw(c254.025,19.583) 256.565,19.583 ; 256.565,19.553 256.565,19.583
PD2: U1.28 U5.4 | length 92.6
  Top Layer w0.254: U1.28@196.501,38.542 U1.28@196.501,38.642 254.449,38.642 254.584,38.506 cw(c254.584,35.966) 257.124,35.966 257.124,19.045 cw(c254.584,19.045) 254.584,16.505 252.74,16.505 ; U5.4@246.855,14.516 246.855,15.781 247.09,16.016 249.242,16.016 249.731,16.505 252.614,16.505 ; 252.614,16.505 ccw(c252.614,18.429) 252.744,16.51 252.74,16.505 ; 252.614,16.505 252.74,16.505
PD3: U1.29 U5.6 | length 92.3
  Top Layer w0.254: U1.29@196.501,39.368 U1.29@196.501,39.429 255.27,39.429 ; U5.6@249.395,14.516 249.395,15.367 250.025,15.997 255.321,15.997 ccw(c255.321,18.537) 257.861,18.537 257.861,36.982 ; 255.27,39.446 cw(c255.27,36.906) 257.81,36.906
PD4: U1.30 U2.9 | length 21.3
  Top Layer w0.3: U1.30@196.501,40.217 199.195,40.217
  Top Layer w0.5: U2.9@196.842,55.972 196.842,52.103 201.498,47.447 201.498,42.52 199.195,40.217
PD5: U1.31 U2.8 | length 19.7
  Top Layer w0.3: U1.31@196.501,41.03 198.357,41.03
  Top Layer w0.5: U2.8@195.572,55.972 195.572,53.652 195.961,53.264 195.961,51.63 200.431,47.16 200.431,43.104 198.357,41.03
PD6: U1.32 U2.7 | length 17.1
  Top Layer w0.5: U2.7@194.302,55.972 194.302,53.652 195.021,52.934 195.021,50.876 198.982,46.916 198.982,44.298 U1.32@196.501,41.817
PD7: U1.33 U2.6 | length 12.2
  Top Layer w0.5: U2.6@193.032,55.972 193.032,53.094 194.139,51.987 U1.33@194.139,44.205
PE0: U1.36 U2.5 | length 12
  Top Layer w0.4: U2.5@191.77,56.058 U1.36@191.77,44.249 ; U1.36@191.77,44.249 cw(c191.726,44.249) U1.36@191.726,44.205 ccw(c191.726,44.249) U1.36@191.77,44.249
  Top Layer w0.5: U2.5@191.726,55.936 U2.5@191.762,55.972
PE1: U1.37 U2.4 | length 12
  Top Layer w0.5: U2.4@190.492,55.972 190.492,53.754 190.938,53.308 U1.37@190.938,44.205
PE2: U1.38 U2.3 | length 12.2
  Top Layer w0.5: U2.3@189.222,55.972 189.222,53.221 190.151,52.292 U1.38@190.151,44.205
PE3: U1.39 U2.2 | length 12.3
  Top Layer w0.5: U2.2@187.952,55.972 187.952,52.941 189.338,51.556 U1.39@189.338,44.205
PE4: U1.40 U4.5 | length 74.3
  Top Layer w0.35: U4.5@123.952,54.635 U4.5@123.952,55.972
  Top Layer w0.5: U4.5@123.952,54.635 123.952,54.381 ccw(c126.492,54.381) 126.492,51.841 131.648,51.841 186.011,51.841 ; 186.087,51.841 186.011,51.841 ; U1.40@188.551,44.205 188.551,49.301 ccw(c186.011,49.301) 186.011,51.841
PE5: U1.41 U4.4 | length 74.6
  Top Layer w0.5: U4.4@122.682,55.972 122.682,53.582 ccw(c125.222,53.582) 125.222,51.042 185.198,51.042 cw(c185.198,48.502) 187.738,48.502 U1.41@187.738,44.205
PE6: U1.42 U4.3 | length 75.3
  Top Layer w0.5: U4.3@121.412,55.972 121.412,52.807 ccw(c123.952,52.807) 123.952,50.267 184.583,50.267 cw(c184.583,47.898) 186.951,47.898 186.951,46.638 ; 186.911,46.678 cw(c186.911,46.638) 186.951,46.638 ; U1.42@186.951,44.205 186.951,46.638
PE7: U1.43 U4.2 | length 75.9
  Top Layer w0.3: U4.2@120.142,55.972 120.142,51.867 ccw(c122.682,51.867) 122.682,49.327 184.365,49.327 cw(c184.365,47.535) 184.459,49.324 cw(c184.365,47.535) 186.157,47.535 U1.43@186.157,44.223
PWM0: U1.16 U6.4 | length 52.7
  Top Layer w0.254: U6.4@227.348,56.556 227.475,56.429 v1@227.475,53.137
  Top Layer w0.4: U1.16@194.139,27.491 194.139,26.84 v2(195.2,25.779)
  Bottom Layer w0.4: v2(195.2,25.779) 205.372,25.779 ccw(c205.372,28.319) 207.168,26.523 226.586,45.941 ccw(c224.79,47.737) 227.33,47.737 v1@227.33,53.213
  other v1: 227.381,53.137
PWM1: U1.17 U6.3 | length 45.7
  Top Layer w0.254: U1.17@196.501,29.854 196.84,29.854 v2@198.121,28.573
  Top Layer w0.4: v1(225.291,48.075) ccw(c223.495,49.871) 226.035,49.871 U6.3@226.035,55.982
  Bottom Layer w0.4: v2(197.867,28.446) 198.183,28.762 204.926,28.762 ccw(c204.926,31.302) 206.722,29.506 v1(225.291,48.075)
PWM2: U1.18 U6.2 | length 45
  Top Layer w0.254: v2@199.009,30.683 196.501,30.683 U1.18@196.501,30.666 v2@199.026,30.666 ; v1@224.808,52.621 U6.2@224.808,55.972 U6.2@224.808,56.556
  Bottom Layer w0.254: v2@199.009,30.734 cw(c199.06,30.734) v2@199.06,30.785
  Bottom Layer w0.4: v2@199.06,30.785 203.723,30.785 ccw(c203.723,33.325) 205.519,31.529 224.046,50.056 ccw(c222.25,51.852) 224.79,51.852 v1@224.79,52.654 ; v1@224.808,52.908 224.808,52.621 v1(224.815,52.629)
  other v2: 198.984,30.709
PWM_OUT0: Q1.3 R1.2 R15.2 | length 7.6
  Top Layer w0.5: Q1.3@205.08,77.572 Q1.3@205.196,77.455 ; Q1.3@205.105,77.451 ccw(c205.105,78.426) Q1.3@205.196,77.455 ; R15.2@206.08,79.934 206.08,78.426 cw(c205.105,78.426) Q1.3@205.196,77.455 ; R1.2@209.245,76.54 206.112,76.54 Q1.3@205.196,77.455
PWM_OUT1: Q2.3 R17.2 R48.2 | length 7.8
  Top Layer w0.5: Q2.3@221.412,77.521 225.053,77.521 R48.2@226.111,76.463 ; Q2.3@221.539,77.604 ccw(c221.539,78.604) 222.539,78.604 R17.2@222.539,79.654
PWM_OUT2: Q3.3 R19.2 R50.2 | length 20.7
  Top Layer w0.5: v1(236.423,77.368) 238.023,77.368 ccw(c238.023,77.673) Q3.3@238.328,77.673 ; Q3.3@238.252,77.604 ccw(c238.252,78.68) 239.328,78.68 R19.2@239.328,79.756 ; R50.2@244.256,71.501 244.256,69.968 ccw(c244.272,69.968) v1@244.272,69.952
  Bottom Layer w0.5: v1@236.372,77.241 236.372,72.314 ccw(c238.912,72.314) 238.912,69.774 v1(244.323,69.774)
R\E\S\E\T\: R8.1 SW2.1 SW2.3 U1.57 | length 106.2
  Top Layer w0.35: 93.387,36.141 96.61,32.918 ; 96.469,33.045 97.656,31.859 ccw(c99.452,33.655) 99.452,31.115 111.273,31.115 ; 111.15,31.166 ccw(c111.273,31.288) 111.273,31.115 ; U1.57@179.813,35.442 167.996,35.442 161.891,29.337 116.864,29.337 cw(c116.864,31.418) 115.392,29.947 114.968,30.371 ccw(c113.172,28.575) 113.172,31.115 111.273,31.115
  Top Layer w0.5: 93.387,36.141 R8.1@93.387,37.554
  Top Layer w0.7: SW2.3@81.759,40.931 SW2.1@88.759,40.931 92.136,37.554 R8.1@93.387,37.554
RXD: FT1.1 P1.2 U1.48 | length 40.4
  Top Layer w0.35: FT1.1@144.112,38.791 144.286,38.617 v1(146.727,38.617) ; P1.2@151.257,42.418 153.044,44.205 U1.48@182.175,44.205
  Bottom Layer w0.35: v1(146.727,38.617) 150.528,42.418 P1.2@151.257,42.418
TXD: FT1.5 P1.1 U1.49 | length 35.8
  Top Layer w0.35: 145.437,41.395 146.489,41.395 148.006,39.878 P1.1@151.257,39.878 153.087,41.708 179.704,41.708 U1.49@179.813,41.817
VCC_5V: C6.1 C13.1 C26.2 C39.1 C41.1 C43.1 FT1.20 OP2.8 OP3.8 OP4.8 REF1.2 REG2.3 U2.1 U2.20 U4.1 U4.20 U6.1 U6.20 USB1.1 | length 426.5
  Top Layer w0.3: OP3.8@28.405,16.625 28.405,16.088 C43.1@31.707,12.786 ; v1@128.615,43.953 v1(128.803,43.764) ; v1@134.315,43.942 134.368,43.995 v1@134.645,43.995 ; 135.552,43.974 136.841,43.974 FT1.20@136.862,43.995
  Top Layer w0.35: v1@134.645,43.995 135.538,43.995
  Top Layer w0.7: OP3.8@28.405,16.625 28.977,16.053 ; 28.727,16.053 28.977,16.053 ; v1(31.115,15.875) ccw(c30.937,15.875) 30.937,16.053 28.977,16.053 ; C43.1@31.877,13.106 31.826,13.056 ccw(c31.469,13.056) 31.722,13.308 28.977,16.053 ; OP4.8@56.591,15.977 56.819,15.977 57.074,15.723 ; OP4.8@56.718,15.799 ccw(c56.794,15.799) 56.794,15.723 57.074,15.723 ; v1@59.284,15.723 57.074,15.723 ; C39.1@59.885,12.911 57.074,15.723 ; OP2.8@85.954,15.926 C41.1@89.459,12.379 ; OP2.8@86.131,16.078 ccw(c86.309,16.078) 86.309,15.9 88.036,15.9 cw(c88.055,15.9) 88.055,15.919 95.258,15.919 ccw(c94.996,17.78) 96.876,17.78 cw(c99.187,17.78) 99.187,20.091 102.965,20.091 ; v1(101.6,34.036) 101.6,40.442 cw(c104.14,40.442) 104.14,42.982 USB1.1@112.247,42.982 ; v1(101.651,24.003) 101.651,24.206 101.676,24.232 101.676,21.742 ccw(c103.378,21.742) 102.965,20.091 ; REF1.2@103.378,20.041 cw(c103.378,21.742) 102.965,20.091 ; REF1.2@104.212,20.091 102.965,20.091
  Top Layer w1: REG2.3@59.973,51.258 59.973,39.954 ccw(c62.513,39.954) 62.513,37.414 62.763,37.414 ccw(c62.763,37.465) C6.1@62.814,37.465 ; 113.563,60.681 116.332,60.681 ccw(c116.332,63.221) 118.872,63.221 U4.20@118.872,65.172 ; 114.554,60.63 116.332,60.63 cw(c116.332,58.09) 116.837,60.579 ; U4.1@118.872,55.972 118.872,58.09 ccw(c116.332,58.09) 116.837,60.579 ; C13.1@123.495,45.077 114.342,45.077 USB1.1@112.247,42.982 cw(c112.247,45.298) 109.931,45.298 109.931,58.039 cw(c112.471,58.039) 112.471,60.579 116.837,60.579 ; C13.1@123.571,44.62 123.721,44.77 125.81,44.77 C26.2@126.558,44.021 ; C26.2@126.568,43.953 v1@128.615,43.953 ; v1@139.598,60.579 116.837,60.579 ; v1@183.134,60.554 184.142,60.554 ; U2.1@186.682,55.972 186.682,58.014 ; 186.682,58.514 186.682,58.014 ; 186.682,62.314 186.682,63.094 ; U2.20@186.682,65.172 186.682,63.094 ; v1@220.574,60.681 220.998,60.681 ccw(c220.998,63.221) 223.538,63.221 U6.20@223.538,65.172 U6.20@223.538,65.756 ; v1@220.599,60.452 222.039,60.452 cw(c222.039,58.953) 223.538,58.953 U6.1@223.538,56.556 ; 184.142,60.554 cw(c184.142,58.014) 186.682,58.014 ; 184.142,60.554 ccw(c184.142,63.094) 186.682,63.094
  Bottom Layer w0.7: v1@31.039,15.773 v1(59.792,15.773) v1@88.036,15.773 ; v1(101.6,34.036) 101.6,24.308 ccw(c101.676,24.308) 101.676,24.232 101.651,24.206 v1(101.651,24.003)
  Bottom Layer w1: v1(59.792,15.773) 59.792,34.696 cw(c62.332,34.696) 62.332,37.236 C6.1@62.789,37.236 ; C6.1@62.992,37.49 64.821,37.49 ccw(c64.821,40.03) 67.361,40.03 67.361,40.442 cw(c69.901,40.442) 69.901,42.982 USB1.1@112.247,42.982 ; v1(128.803,43.764) 133.909,43.764 v1(134.036,43.891) ; v1(139.675,60.604) 188.697,60.604 ; 188.824,60.477 ccw(c188.697,60.477) 188.697,60.604 ; v1@220.65,60.604 188.697,60.604
  other v1: 88.087,15.824 183.21,60.579 220.65,60.579
VCC_10V: FB2.2 R15.1 R17.1 R19.1 | length 194.7
  Top Layer w1: v1@201.803,79.908 cw(c201.828,79.908) 201.828,79.934 R15.1@204.08,79.934 ; v1@218.44,79.731 ccw(c218.516,79.731) 218.516,79.654 R17.1@220.539,79.654 ; v1@235.509,79.68 cw(c235.56,79.68) 235.56,79.731 R19.1@237.354,79.731
  Bottom Layer w1: FB2.2@52.857,73.05 52.857,77.216 cw(c55.397,77.216) 55.397,79.756 v1@235.661,79.756
  other v1: 218.364,79.629 235.458,79.68 201.752,79.807
pads on no net: FT1.2 FT1.3 FT1.6 FT1.8 FT1.9 FT1.10 FT1.11 FT1.12 FT1.13 FT1.14 FT1.19 FT1.24 FT1.27 FT1.28 HC2.5 HC2.6 HC2.7 HC2.8 HC2.11 HC2.12 HC2.13 HC2.14 OP1.5 OP1.6 OP1.7 R12.6 R12.7 R12.8 R12.9 R20.8 R20.9 R21.8 R21.9 REF1.1 REF1.3 REF1.7 REF1.8 SW2.5 U1.3 U1.4 U1.5 U1.19 U1.46 U1.47 U1.50 U1.51 U1.54 U1.55 U1.56 U1.58 U1.59 U3.13 U3.16 U4.6 U4.7 U4.8 U4.9 U4.10 U4.11 U4.12 U4.13 U4.14 U5.13 U5.16 U6.5 U6.6 U6.7 U6.8 U6.9 U6.11 U6.12 U6.13 U6.14 U6.15 USB1.6

## Polygon pours and split planes (outlines as drawn)
GND on Top Layer "Top Layer-No Net" (solid, remove dead copper, pour order 2): 259.918,89.84 259.791,89.713 259.791,0.229 0.305,0.229 0.178,0.356 0.152,0.381 0.152,89.891

## Keep-outs
Keep-Out Layer:
  the board outline again, w0.254

## Other copper
Top Layer:
  rectangle net NetD1_1: 10.109,33.934 15.011,39.04
  rectangle net GND: 184.22,31.367 191.967,40.765
Bottom Layer:
  rectangle net GND: 183.389,30.732 192.787,41.654
  region net +3.3V: 179.64,43.916 179.64,27.033 196.523,27.033 196.523,43.916 194.634,41.445 194.634,28.872 181.68,28.872 181.68,41.572

## Text inside footprints (layer, text, board x,y; h text height)
C7: Top Overlay "+" at 75.053,56.078 h1 r270
C13: Top Overlay "+" at 124.648,45.647 h1 r270
C24: Bottom Overlay "+" at 173.67,31.661 h1 r270
C32: Bottom Overlay "+" at 162.494,32.042 h1 r270